# Altium PCB SPI-UART.pcbdoc
Units mil, origin at the board's own origin, x right, y up, seen from the top; angles counter-clockwise.
Board outline 1700 x 1700 mil, 2 copper layers (Top Layer, Bottom Layer); 20 components, 17 nets, 59 pads, 9 vias.
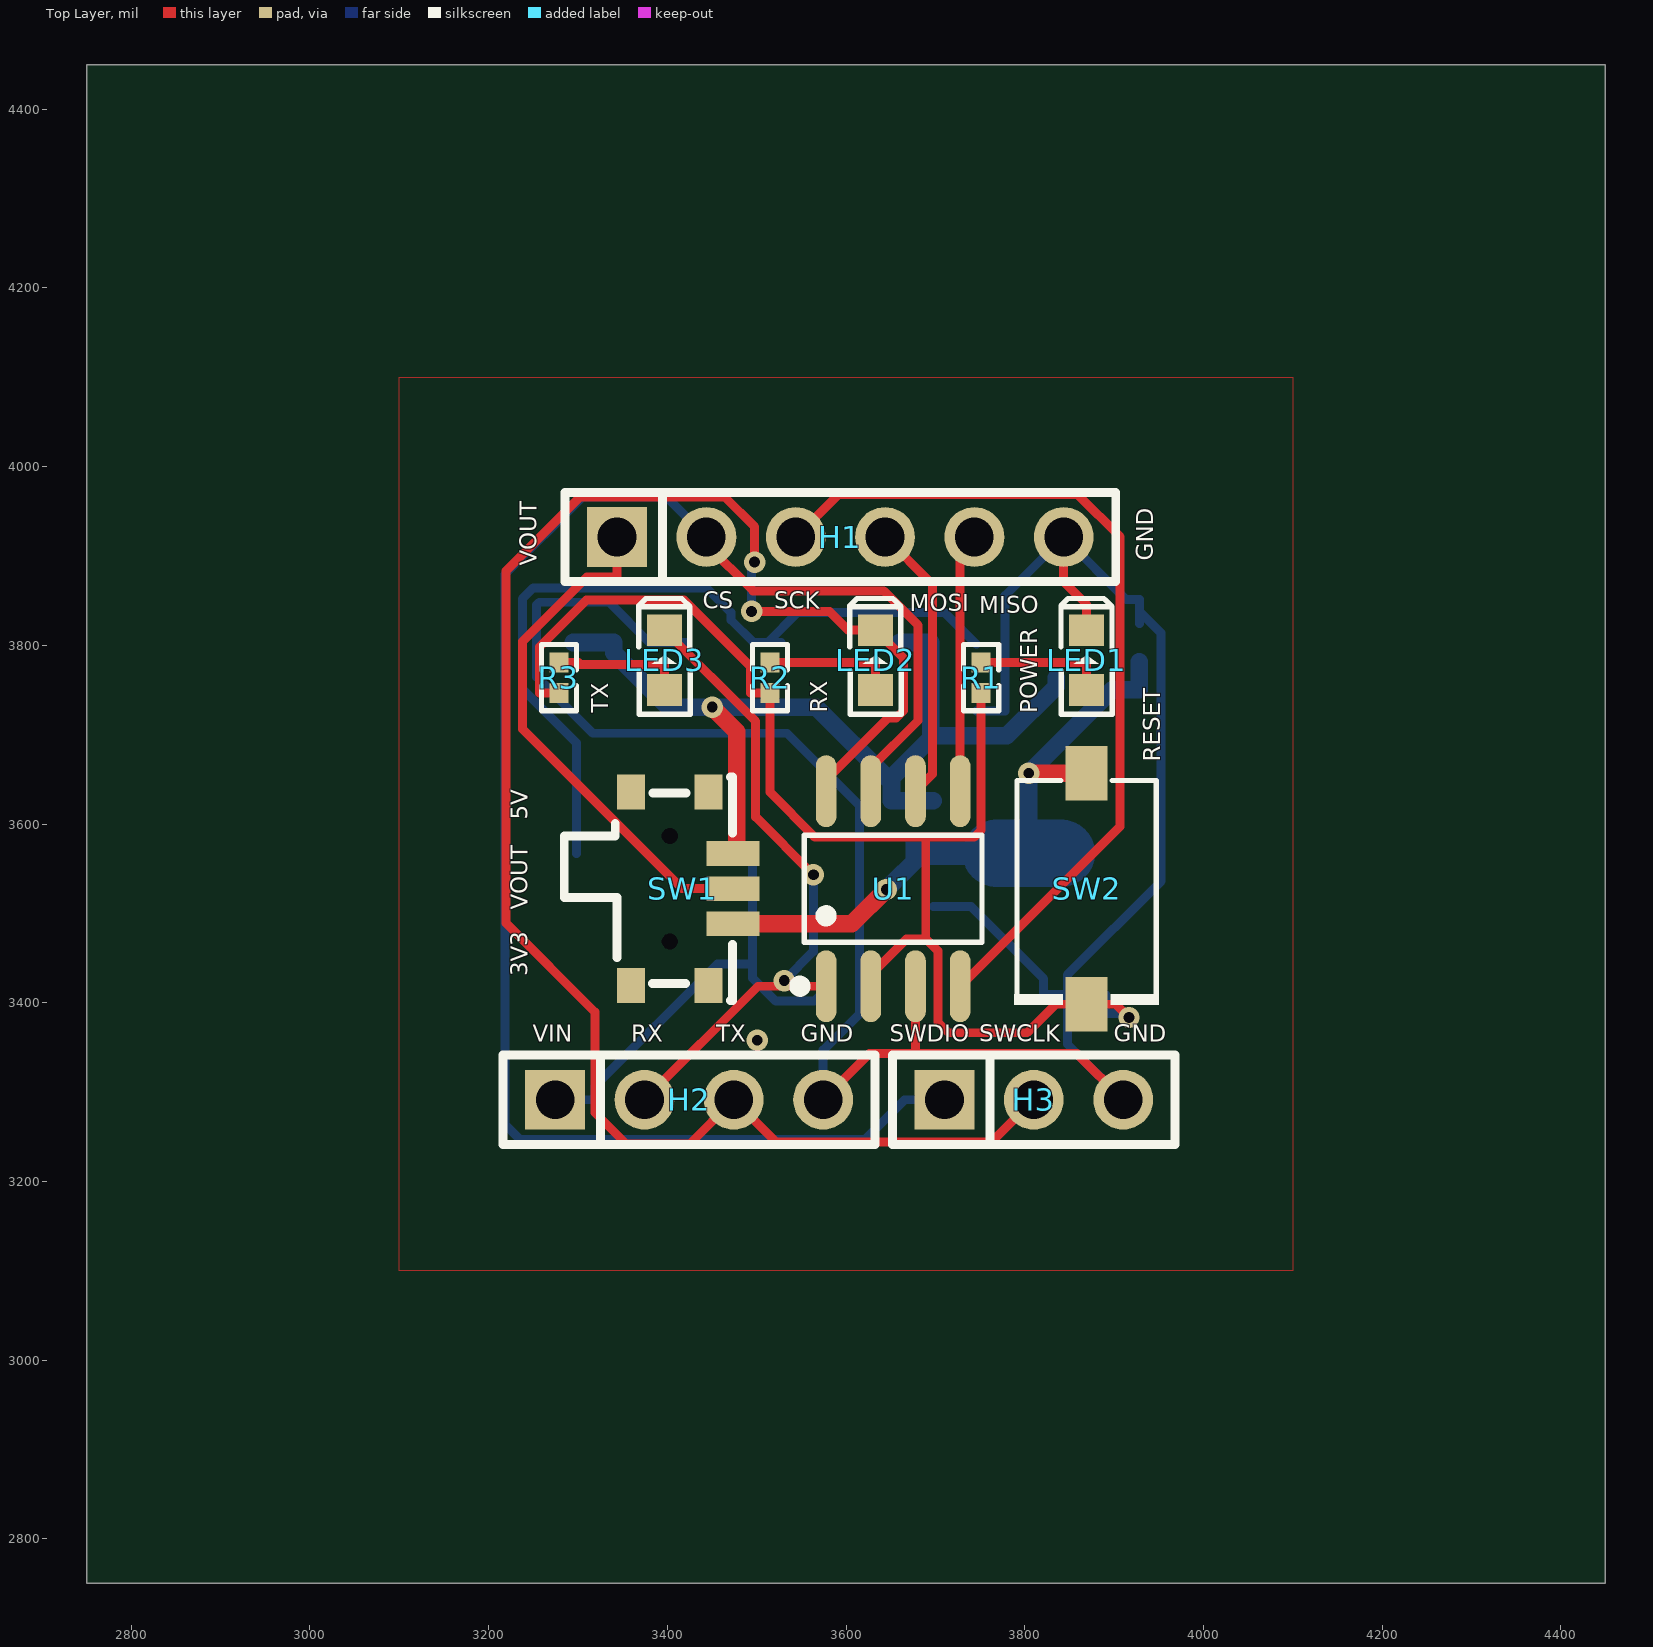
[diagram p0: Top Layer view]
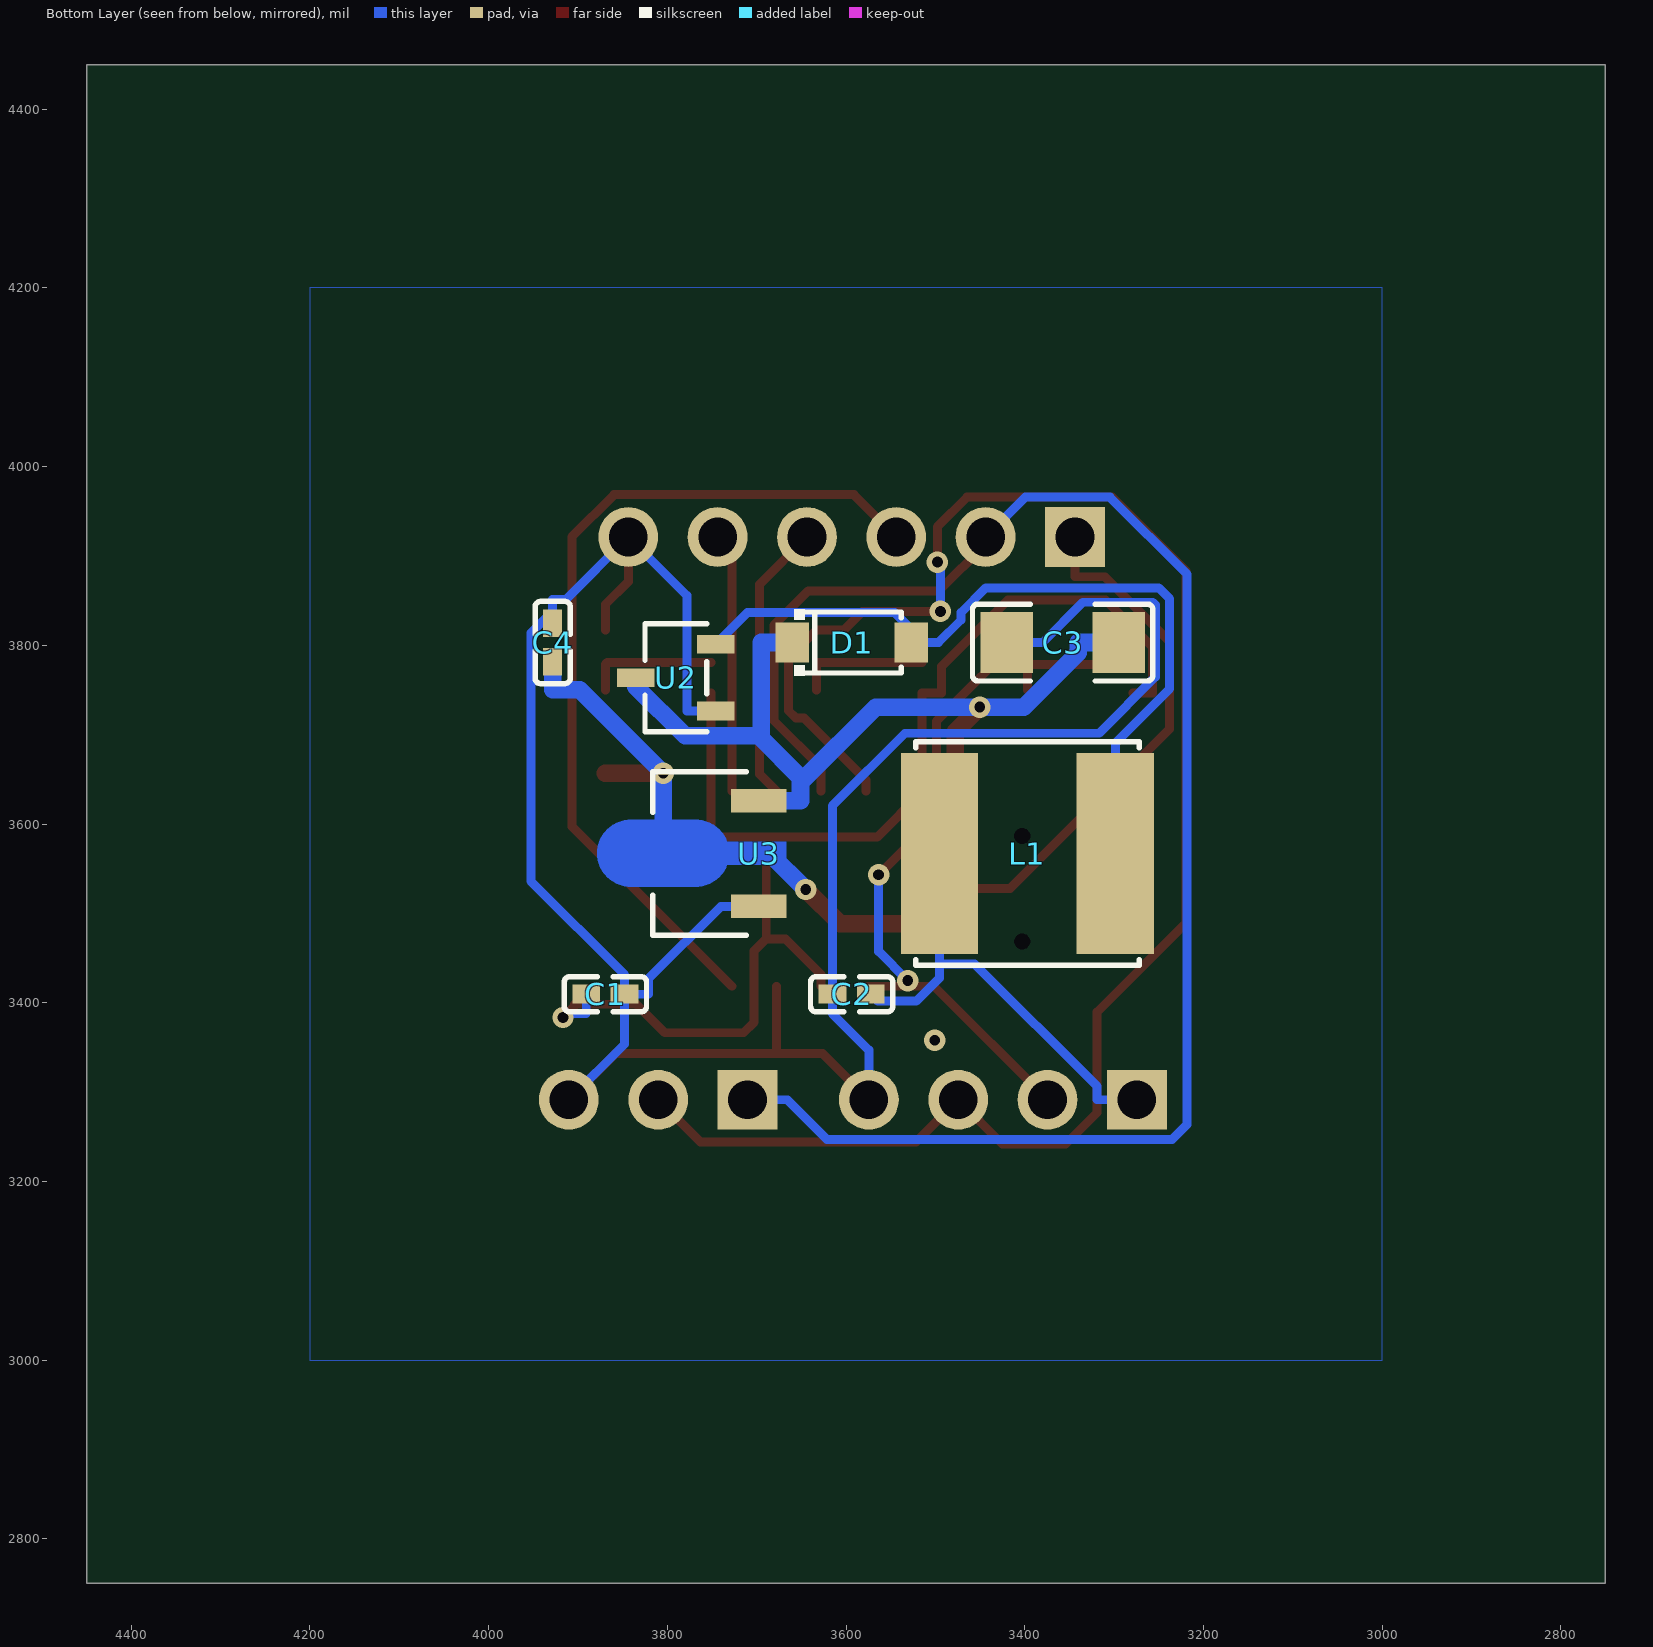
[diagram p1: Bottom Layer view, seen from below]

## Layer stack, top to bottom
Top Solder: solder mask 0.4, Solder Resist, Dk 3.5
Top Layer: signal copper 1.4
Dielectric 1: dielectric 12.6, FR-4, Dk 4.8
Bottom Layer: signal copper 1.4
Bottom Solder: solder mask 0.4, Solder Resist, Dk 3.5

## Board outline
4450,2750 2750,2750 2750,4450 4450,4450

## Components (designator, comment, footprint, x,y, rotation, side; value= is the part's Value field where it differs from the comment)
C1 "10uF" C0402 3869.29,3409.45 r180 bottom
C2 "10uF" C0402 3593.7,3409.45 r0 bottom
C3 "100uF" C1206 3357.48,3803.15 r180 bottom
C4 "10uF" C0402 3928.35,3803.15 r90 bottom
D1 "1N5819W_C727115" SOD-123_L2.8-W1.8-LS3.7-RD 3593.7,3803.15 r180 bottom
H1 "HB3106F" HDR-TH_6P-P2.54-V-M 3593.7,3921.26 r0 top
H2 "PZ254V-11-04P" HDR-TH_4P-P2.54-V-M 3424.41,3291.34 r0 top
H3 "A2541WV-3P_C609572" HDR-TH_3P-P2.54-V-M 3810.24,3291.34 r0 top
L1 "47uH" IND-SMD_L6.0-W6.0 3396.85,3566.93 r180 bottom
LED1 "LED-0603_R" LED0603_RED 3869.29,3783.47 r90 top
LED2 "LED-0603_G" LED0603_GREEN 3633.07,3783.47 r90 top
LED3 "LED-0603_B" LED0603_BLUE 3396.85,3783.47 r90 top
R1 "4.7K" R0402 3751.18,3763.78 r90 top
R2 "4.7K" R0402 3514.96,3763.78 r90 top
R3 "4.7K" R0402 3278.74,3763.78 r90 top
SW1 "MINI MSK12CO2" SW-SMD_MSK12CO2 3416.53,3527.56 r270 top
SW2 "TS-1089A-B3D4" KEY-SMD_2P-L6.0-W3.8-P7.30-L 3869.29,3527.56 r90 top
U1 "STM32G031J6M6" SOIC-8_L4.9-W3.9-P1.27-LS6.0-BL 3652.76,3527.56 r0 top
U2 "QX2303L50T" SOT-23-3_L2.9-W1.6-P1.90-LS2.8-BR 3790.55,3763.78 r180 bottom
U3 "LM1117F-3.3" SOT-89_L4.5-W2.5-P1.50-LS4.2-BR 3751.18,3566.93 r180 bottom

## Footprints (in the part's own frame and the unit in brackets; to place one, negate y for a bottom-side part, rotate by r counter-clockwise, add the part's x,y. Pads: shape width x height; smd on the part's side, far side on the other; paste and mask are expansions set on the pad)
C0402 [mm]
  rect 0.79x0.54 smd: 1(-0.545,0) 2(0.545,0)
  silkscreen extent -1.17,-0.5 1.17,0.5
C1206 [mm]
  rect 1.485x1.728 smd: 1(-1.593,0) 2(1.593,0)
  silkscreen extent -2.56,-1.09 2.56,1.09
HDR-TH_3P-P2.54-V-M [mm]
  rect 1.7x1.7 hole 1.1: 1(-2.54,0)
  round 1.7 hole 1.1: 2(0,0) 3(2.54,0)
  silkscreen extent -4.02,-1.27 4.02,1.27
HDR-TH_4P-P2.54-V-M [mm]
  rect 1.7x1.7 hole 1.1: 1(-3.81,0)
  round 1.7 hole 1.1: 2(-1.27,0) 3(1.27,0) 4(3.81,0)
  silkscreen extent -5.29,-1.27 5.29,1.27
HDR-TH_6P-P2.54-V-M [mm]
  rect 1.7x1.7 hole 1.1: 1(-6.35,0)
  round 1.7 hole 1.1: 2(-3.81,0) 3(-1.27,0) 4(1.27,0) 5(3.81,0) 6(6.35,0)
  silkscreen extent -7.83,-1.27 7.83,1.27
IND-SMD_L6.0-W6.0 [mm]
  rect 2.2x5.72 smd: 1(-2.5,0) 2(2.5,0)
  silkscreen extent -3.18,-3.18 3.18,3.18
KEY-SMD_2P-L6.0-W3.8-P7.30-L [mm]
  rect 1.55x1.2 smd: 1(3.285,0) 2(-3.285,0)
  silkscreen extent -3.3,-2.05 3.08,2.05
LED0603_BLUE [mm]
  rect 0.9x1 smd: 1(-0.85,0) 2(0.85,0)
  silkscreen extent -1.54,-0.73 1.75,0.73
LED0603_GREEN [mm]
  rect 0.9x1 smd: 1(-0.85,0) 2(0.85,0)
  silkscreen extent -1.54,-0.73 1.75,0.73
LED0603_RED [mm]
  rect 0.9x1 smd: 1(-0.85,0) 2(0.85,0)
  silkscreen extent -1.54,-0.73 1.75,0.73
R0402 [mm]
  rect 0.566x0.54 smd: 1(-0.433,0) 2(0.433,0)
  silkscreen extent -0.94,-0.5 0.94,0.5
SOD-123_L2.8-W1.8-LS3.7-RD [mm]
  rect 0.95x1.15 smd: 1(-1.692,0) 2(1.692,0)
  silkscreen extent -1.63,-0.94 1.41,0.94
SOIC-8_L4.9-W3.9-P1.27-LS6.0-BL [mm]
  oval 0.588x2.045 smd: 1(-1.905,-2.772) 2(-0.635,-2.772) 3(0.635,-2.772) 4(1.905,-2.772) 5(1.905,2.772) 6(0.635,2.772) 7(-0.635,2.772) 8(-1.905,2.772)
  silkscreen extent -2.8,-2.92 2.53,1.52
SOT-23-3_L2.9-W1.6-P1.90-LS2.8-BR [mm]
  rect 1.07x0.532 smd: 1(1.135,-0.95) 2(1.135,0.95) 3(-1.135,0)
  silkscreen extent -0.88,-1.54 0.88,1.54
SOT-89_L4.5-W2.5-P1.50-LS4.2-BR [mm]
  rect 1.575x0.672 smd: 1(1.356,-1.5) 3(1.356,1.5)
  Top Layer region: -2.283,0.959 -0.429,0.959 -0.385,0.958 -0.34,0.955 -0.296,0.949 -0.252,0.942 -0.208,0.933 -0.165,0.921 -0.123,0.908 -0.081,0.893 -0.04,0.875 0,0.856 0.04,0.835 0.078,0.812 0.115,0.788 0.151,0.761 0.185,0.733 0.219,0.704 0.251,0.673 0.281,0.64 0.31,0.606 0.337,0.571 0.362,0.534 0.386,0.497 0.408,0.458 0.428,0.418 0.447,0.339 2.144,0.339 2.144,-0.321 0.447,-0.321 0.428,-0.401 0.408,-0.44 0.386,-0.479 0.362,-0.517 0.337,-0.553 0.31,-0.588 0.281,-0.622 0.251,-0.655 0.219,-0.686 0.185,-0.716 0.151,-0.744 0.115,-0.77 0.078,-0.795 0.04,-0.818 0,-0.839 -0.04,-0.858 -0.081,-0.875 -0.123,-0.89 -0.165,-0.904 -0.208,-0.915 -0.252,-0.925 -0.296,-0.932 -0.34,-0.937 -0.385,-0.94 -0.429,-0.941 -2.283,-0.941 -2.328,-0.94 -2.372,-0.937 -2.416,-0.932 -2.46,-0.925 -2.504,-0.915 -2.547,-0.904 -2.589,-0.89 -2.631,-0.875 -2.672,-0.858 -2.713,-0.839 -2.752,-0.818 -2.79,-0.795 -2.827,-0.77 -2.863,-0.744 -2.898,-0.716 -2.931,-0.686 -2.963,-0.655 -2.993,-0.622 -3.022,-0.588 -3.049,-0.553 -3.075,-0.517 -3.098,-0.479 -3.12,-0.44 -3.141,-0.401 -3.159,-0.36 -3.175,-0.318 -3.189,-0.276 -3.202,-0.233 -3.212,-0.19 -3.22,-0.146 -3.227,-0.102 -3.231,-0.058 -3.233,-0.013 -3.233,0.031 -3.231,0.076 -3.227,0.12 -3.22,0.164 -3.212,0.208 -3.202,0.251 -3.189,0.294 -3.175,0.336 -3.159,0.377 -3.141,0.418 -3.12,0.458 -3.098,0.497 -3.075,0.534 -3.049,0.571 -3.022,0.606 -2.993,0.64 -2.963,0.673 -2.931,0.704 -2.898,0.733 -2.863,0.761 -2.827,0.788 -2.79,0.812 -2.752,0.835 -2.713,0.856 -2.672,0.875 -2.631,0.893 -2.589,0.908 -2.547,0.921 -2.504,0.933 -2.46,0.942 -2.416,0.949 -2.372,0.955 -2.328,0.958
  silkscreen extent -1.65,-2.33 1,2.33
SW-SMD_MSK12CO2 [mm]
  rect 0.7x1.5 smd: 1(-1,1.45) 2(0,1.45) 3(1,1.45)
  rect 1x0.8 smd: 4(-2.75,0.75) 5(2.75,0.75) 6(-2.75,-1.45) 7(2.75,-1.45)
  Multi-Layer board cut-out: -1.5,-0.125 -1.597,-0.147 -1.676,-0.21 -1.719,-0.3 -1.719,-0.4 -1.676,-0.49 -1.597,-0.553 -1.5,-0.575 -1.5,-0.575 -1.402,-0.553 -1.324,-0.49 -1.281,-0.4 -1.281,-0.3 -1.324,-0.21 -1.402,-0.147 -1.5,-0.125
  Multi-Layer board cut-out: 1.5,-0.125 1.402,-0.147 1.324,-0.21 1.281,-0.3 1.281,-0.4 1.324,-0.49 1.402,-0.553 1.5,-0.575 1.5,-0.575 1.598,-0.553 1.676,-0.49 1.719,-0.4 1.719,-0.3 1.676,-0.21 1.598,-0.147 1.5,-0.125
  silkscreen extent -3.18,-3.35 3.17,1.43

## Via types
v1: diameter 24.02, hole 12.01, Top Layer to Bottom Layer, 9 vias

## Nets (pads, with @x,y where several pads share a name; then routed paths per layer and width w, separated by ;. In a path a pad name is that pad's centre, name@x,y a point inside that pad or via, vN(x,y) a via of type N, cw(c..) or ccw(c..) an arc to the next point about the centre after c; other vN are vias at no path point)
3V3: C1.1 R1.1 R2.1 R3.1 SW2.2 U1.2 | length 1531
  Top Layer w10: R3.1 3257.04,3746.74 3257.04,3798.32 3309.32,3850.6 3418.81,3850.6 3493.26,3776.15 3493.26,3746.74 R2.1 3514.96,3635.55 3565.13,3585.38 3689.28,3585.38 ; U1.2 3627.76,3431.4 3667.81,3471.45 3689.28,3471.45 ; R1.1 3751.18,3593.12 3743.44,3585.38 3689.28,3585.38 ; v1(3916.8,3383.4) 3903.98,3396.22 3903.98,3398.23 SW2.2 3834.6,3398.23 3802.67,3366.3 3714.75,3366.3 3702.76,3378.29 3702.76,3457.97 3689.28,3471.45 ; 3689.28,3471.45 3689.28,3585.38
  Bottom Layer w10: C1.1 3890.75,3387.75 3912.45,3387.75 v1(3916.8,3383.4)
3V3P: C4.1 SW1.3 SW2.1 | length 711.9
  Top Layer w19.68: SW1.3 3606.65,3488.19 v1(3645.16,3526.7) ; v1(3804.58,3656.89) SW2.1
  Bottom Layer w19.68: v1(3645.16,3526.7) 3685.73,3567.27 3804.58,3567.27 v1(3804.58,3656.89) 3898,3750.31 3928.35,3750.31 C4.1@3928.35,3781.69
5V: C3.2 D1.1 SW1.1 U2.3 U3.3 | length 1052.4
  Top Layer w19.68: v1(3450.23,3730.85) 3477.72,3703.36 3477.72,3571.02 SW1.1
  Bottom Layer w19.68: C3.2 3339.85,3803.15 3339.85,3791.88 3400.88,3730.85 v1(3450.23,3730.85) 3566.73,3730.85 3648.33,3649.26 ; D1.1 3677.6,3803.15 3694.86,3803.15 3694.86,3701.63 3697.78,3698.71 ; U3.3 3650.95,3625.99 3650.95,3646.63 3648.33,3649.26 ; U2.3 3835.24,3753.82 3780.13,3698.71 3697.78,3698.71 ; 3648.33,3649.26 3697.78,3698.71
GND: C1.2 C2.2 C3.1 C4.2 H1.6 H2.4 H3.3 LED1.2 U1.3 U2.1 U3.1 | length 2824.3
  Top Layer w10: H2.4 3626.11,3343.04 3677.76,3343.04 ; U1.3 3677.76,3343.04 ; H1.6 3843.7,3871.3 3869.29,3845.71 LED1.2 ; H3.3 3858.54,3343.04 3677.76,3343.04
  Bottom Layer w10: C3.1 3379.88,3803.15 3334.79,3848.24 3256.66,3848.24 3253.74,3845.32 3253.74,3764.63 3316.76,3701.61 3533.96,3701.61 3615.16,3620.41 3615.16,3431.15 C2.2 3615.16,3398.6 3615.16,3387.75 3574.41,3347 H2.4 ; U3.1 3739.86,3507.88 3821.21,3426.53 3821.21,3409.45 C1.2 ; U2.1 3778,3726.38 3778,3855.56 H1.6 3913.73,3851.23 3928.35,3851.23 C4.2@3928.35,3837.92 ; H3.3 3847.83,3353.75 C1.2 ; C4.2@3928.35,3824.61 C4.2@3928.35,3837.92 ; C1.2 3847.83,3431.15 3952.63,3535.95 3952.63,3813.64 C4.2@3928.35,3837.92
  other v1: 3500.6,3357.79
LED1_1: LED1.1 R1.2 | length 147.7
  Top Layer w10: R1.2 3867.25,3780.82 3869.29,3778.78 LED1.1
LED2_1: LED2.1 R2.2 | length 147.7
  Top Layer w10: R2.2 3631.03,3780.82 3633.07,3778.78 LED2.1
LED3_1: LED3.1 R3.2 | length 147.7
  Top Layer w10: R3.2 3300.44,3780.82 3302.48,3778.78 3396.85,3778.78 LED3.1
SPI1_CS: H1.2 H3.1 U1.7 | length 1903
  Top Layer w10: H1.2 3443.7,3913.35 3496.03,3861.02 3642.03,3861.02 3680.69,3822.36 3680.69,3715.84 3627.76,3662.91 U1.7
  Bottom Layer w10: H1.2 3399.15,3965.81 3304.66,3965.81 3218.25,3879.4 3218.25,3263.78 3235.23,3246.8 3621.16,3246.8 3665.7,3291.34 H3.1
SPI1_MISO: H1.5 U1.5 | length 291.2
  Top Layer w10: U1.5 3727.76,3905.32 H1.5
SPI1_MOSI: H1.4 U1.6 | length 314.4
  Top Layer w10: H1.4 3696.78,3868.18 3696.78,3655.73 U1.6
SPI1_SCK: H1.3 U1.4 | length 979.5
  Top Layer w10: H1.3 3591.14,3968.7 3859.59,3968.7 3906.76,3921.53 3906.76,3597.41 U1.4
U1_RX: H2.2 LED3.2 U1.1 | length 737
  Top Layer w10: H2.2 3501.48,3418.41 v1@3530.95,3418.41 ; LED3.2 3498.86,3714.92 3498.86,3607.88 v1(3563.52,3543.22) ; v1(3530.95,3424.77) v1@3530.95,3418.41 ; U1.1 v1@3530.95,3418.41
  Bottom Layer w10: v1(3530.95,3424.77) 3563.52,3457.34 v1(3563.52,3543.22)
U1_TX: H2.3 H3.2 LED2.2 U1.8 | length 2017
  Top Layer w10: v1(3494.34,3837.93) 3581.32,3837.93 3602.32,3816.93 LED2.2 3664.5,3785.5 3664.5,3727.05 3656.14,3718.69 3647.17,3718.69 3577.76,3649.28 U1.8 ; v1(3497.68,3893.21) 3497.68,3932.69 3464.56,3965.81 3302.09,3965.81 3219.63,3883.35 3219.63,3488.89 3318.96,3389.56 3318.96,3277.07 3354.23,3241.8 3424.87,3241.8 H2.3 3521.84,3243.91 3762.81,3243.91 H3.2
  Bottom Layer w10: v1(3494.34,3837.93) 3494.34,3889.87 v1(3497.68,3893.21)
U2_2: D1.2 L1.2 U2.2 | length 897.4
  Bottom Layer w10: L1.2 3298.43,3690.6 3237.65,3751.38 3237.65,3851.99 3250,3864.34 3443.55,3864.34 3471.26,3836.63 3471.26,3828.37 3496.48,3803.15 3497.3,3803.15 D1.2@3512.19,3803.15 ; D1.2 D1.2@3512.19,3803.15 ; U2.2 3710.18,3836.87 3545.91,3836.87 D1.2@3512.19,3803.15
VIN: C2.1 H2.1 L1.1 | length 522.7
  Bottom Layer w10: H2.1 3318.95,3291.34 3318.95,3306.33 3455.88,3443.26 3495.28,3443.26 ; L1.1 3495.28,3443.26 ; C2.1 3564.48,3401.69 3521.39,3401.69 3495.28,3427.8 3495.28,3443.26
VOUT: H1.1 SW1.2 | length 588.2
  Top Layer w10: H1.1 3343.7,3876.73 3310.3,3876.73 3237.91,3804.34 3237.91,3706.1 3416.45,3527.56 SW1.2
"": 
pads on no net: SW1.4 SW1.5 SW1.6 SW1.7

## Polygon pours and split planes (outlines as drawn)
GND on Top Layer (solid, remove dead copper): 3100,4100 4100,4100 4100,3100 3100,3100
GND on Bottom Layer (solid, remove dead copper, pour order 1): 3000,4200 4200,4200 4200,3000 3000,3000

## Silkscreen, mask and mechanical layers (free items; w line width, h text height)
Top Overlay:
  text "GND" at 3943.94,3894.5 h18.84 r90
  text "VOUT" at 3253.94,3889.27 h18.84 r90
  text "CS" at 3439.72,3841.06 h18.84
  text "SCK" at 3519.5,3841.06 h18.84
  text "MOSI" at 3671.61,3837.93 h18.84
  text "MISO" at 3749.27,3836.06 h18.84
  text "TX" at 3333.94,3724.72 h18.84 r90
  text "RX" at 3578.94,3724.72 h18.84 r90
  text "POWER" at 3813.94,3724.04 h18.84 r90
  text "RESET" at 3951.57,3669.59 h18.84 r90
  text "5V" at 3243.94,3604.72 h18.84 r90
  text "VOUT" at 3243.94,3504.27 h18.84 r90
  text "3V3" at 3243.94,3429.5 h18.84 r90
  text "VIN" at 3249.5,3356.06 h18.84
  text "RX" at 3359.72,3356.06 h18.84
  text "TX" at 3454.72,3356.06 h18.84
  text "GND" at 3549.5,3356.06 h18.84
  text "SWDIO" at 3649.04,3356.06 h18.84
  text "SWCLK" at 3749.04,3356.06 h18.84
  text "GND" at 3899.5,3356.06 h18.84
Mechanical 1:
  lines w10: 3200,3212.6 3987.4,3212.6 3987.4,4000 3200,4000 3200,3212.6